# Altium PCB FA TOOL 20131212_V2.0.PcbDoc (part 2 of 2)
Units mm, origin at the board's own origin, x right, y up, seen from the top; angles counter-clockwise.
Board outline 121.5 x 90 mm, 4 copper layers (Top Layer, Mid-Layer 1, Mid-Layer 2, Bottom Layer); 249 components, 157 nets, 678 pads, 153 vias.
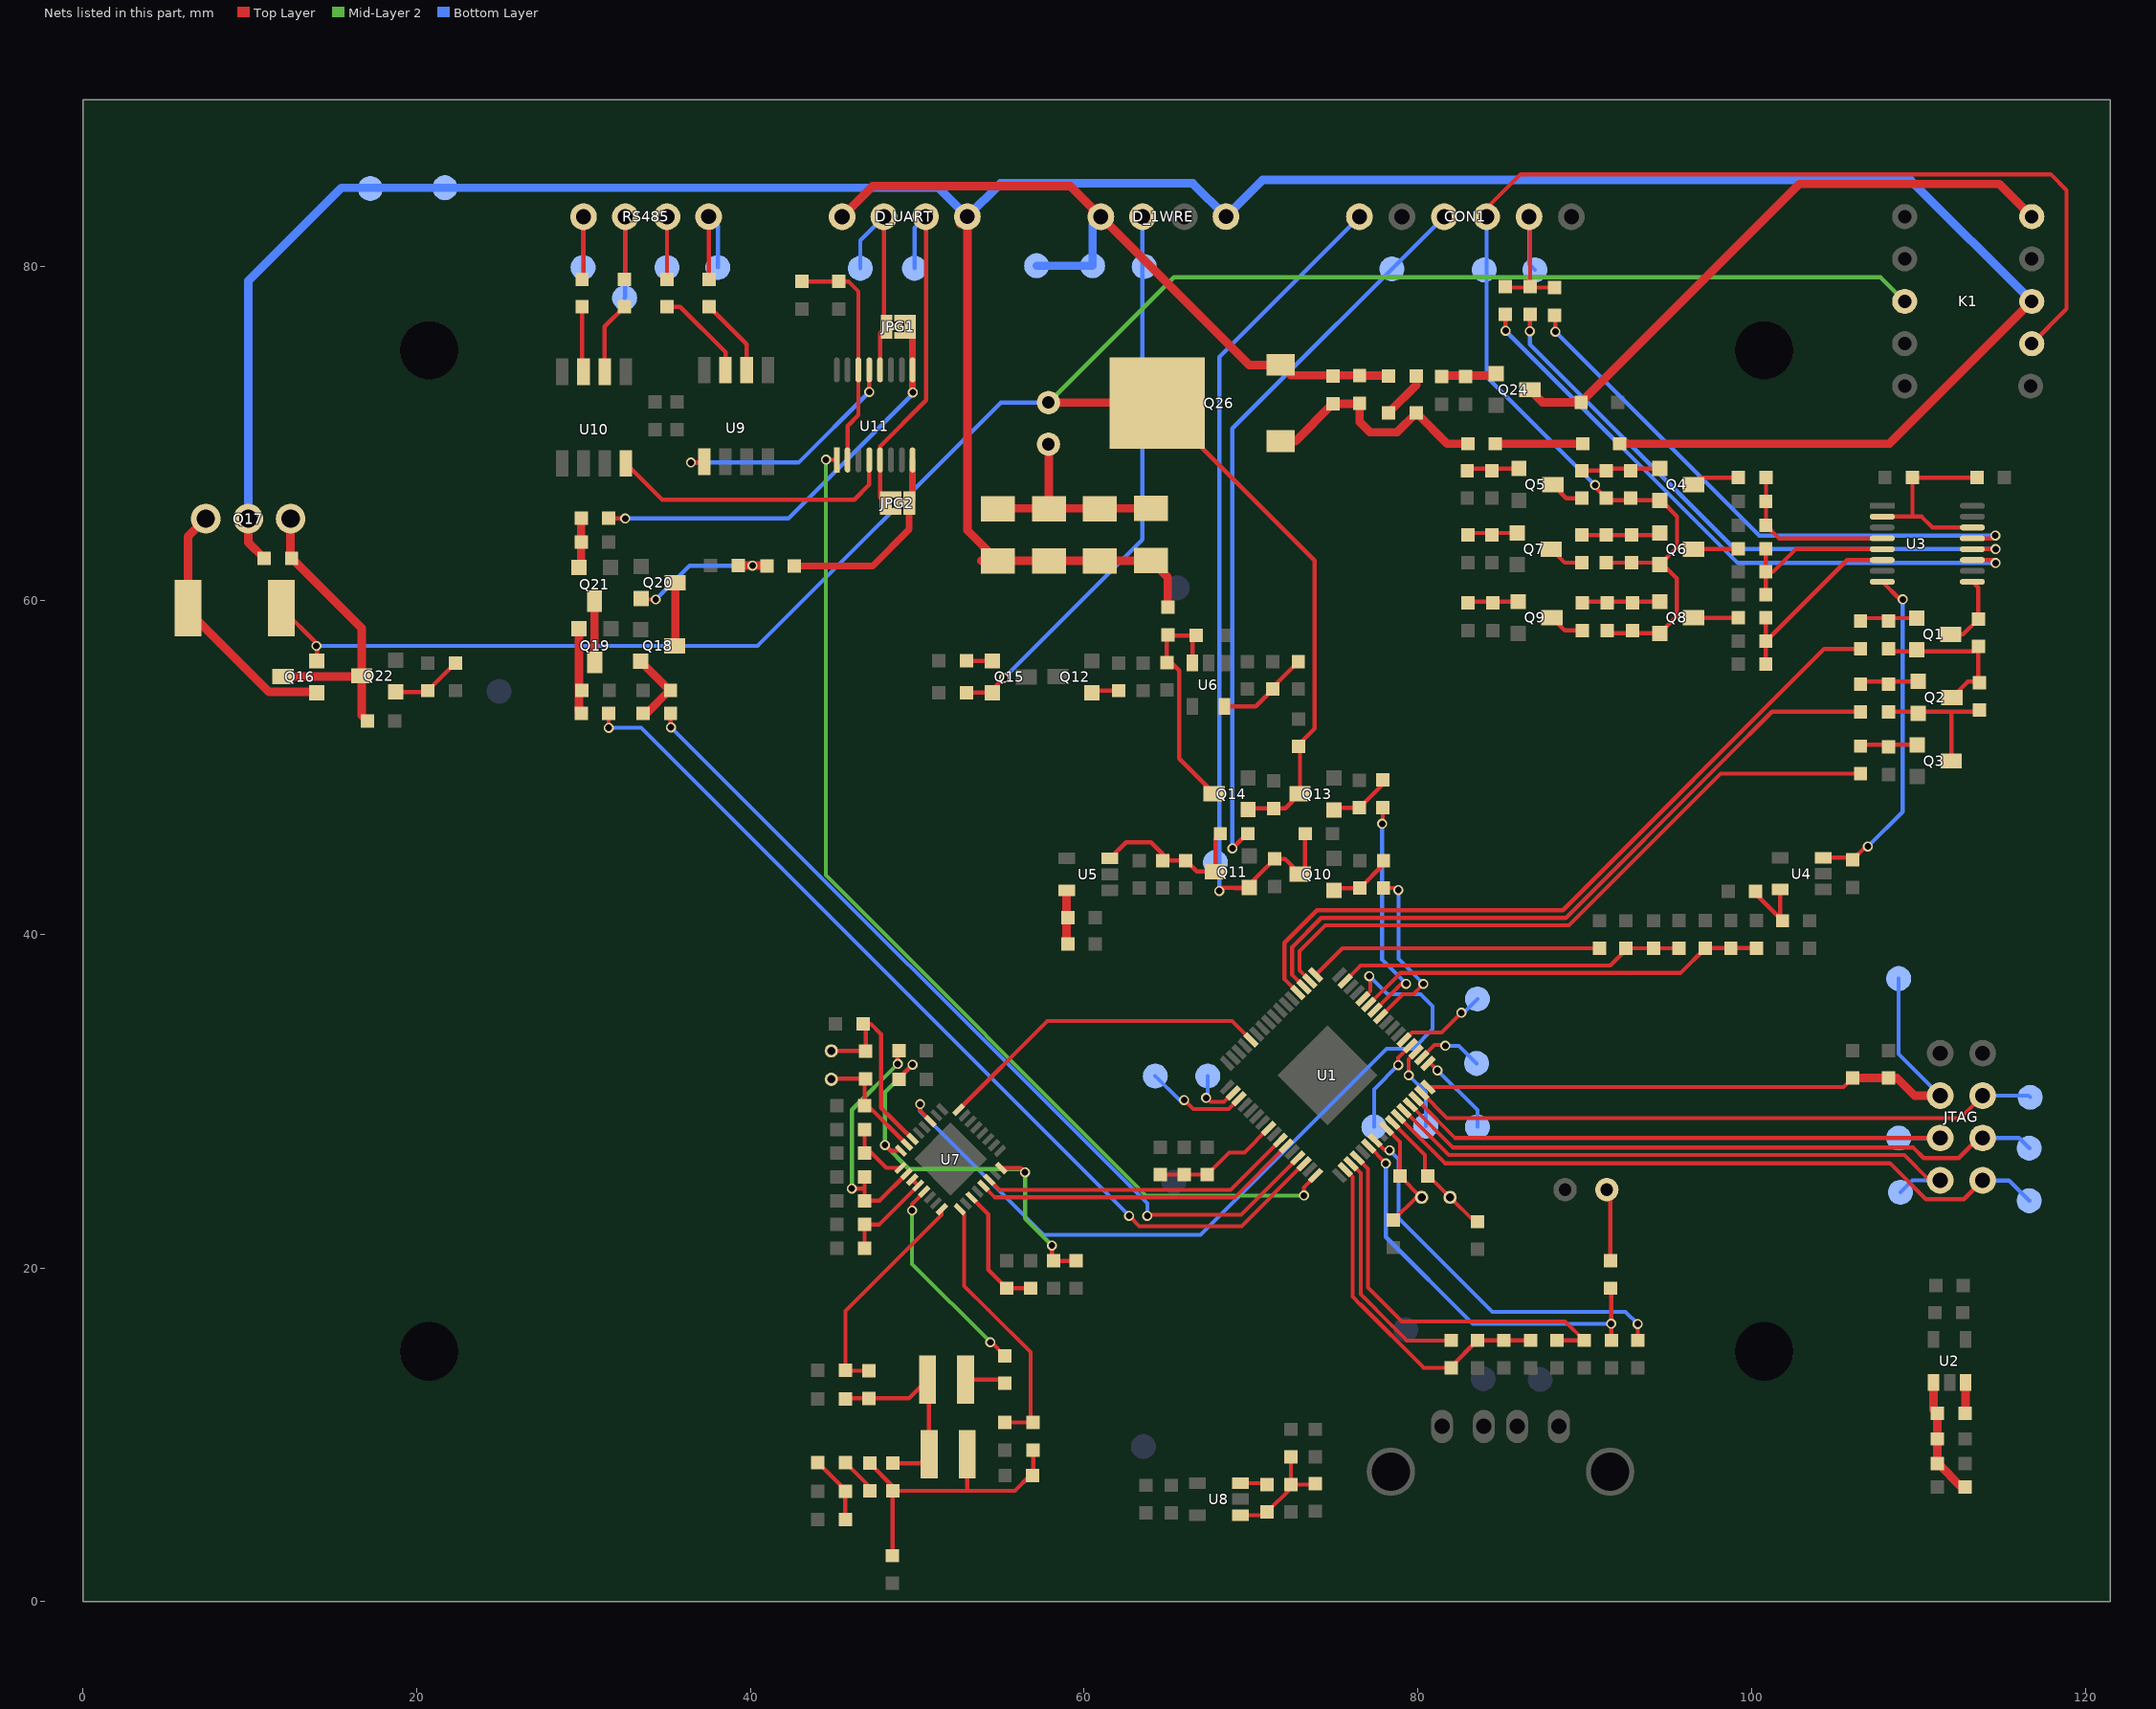
[diagram p4: the nets of this part, all layers, seen from the top]

## Via types
v1: diameter 0.6, hole 0.4, Top Layer to Bottom Layer, tented both sides, 153 vias

## Nets (pads, with @x,y where several pads share a name; then routed paths per layer and width w, separated by ;. In a path a pad name is that pad's centre, name@x,y a point inside that pad or via, vN(x,y) a via of type N, cw(c..) or ccw(c..) an arc to the next point about the centre after c; other vN are vias at no path point) (continued)
"I/O 7": U1.28 U7.24 | length 20
  Top Layer w0.23: 57.774,34.773 57.786,34.785 ; 57.798,34.785 68.874,34.785 U1.28@69.889,33.77
  Top Layer w0.254: U7.24@52.483,29.482 57.774,34.773
"ID PIN": CON1.5 R14.2 R15.2 R16.2 TP35.1 | length 10.5
  Top Layer w0.23: R16.2@85.242,78.803 85.293,78.752 R14.2@88.189,78.752 ; CON1.5@86.66,83 86.716,82.944 R15.2@86.716,78.803
  Bottom Layer w0.23: CON1.5@86.66,83 86.66,80.167 TP35.1@87.02,79.807
IRQ: U1.43 U7.13 | length 19.7
  Top Layer w0.23: U7.13@53.962,24.922 54.652,24.232 69.041,24.232 U1.43@72.112,27.304
"LEV 1": R23.1 U1.18 | length 40.1
  Top Layer w0.23: U1.18@73.527,37.204 72.9,37.83 72.9,38.979 74.459,40.538 89.059,40.538 98.141,49.619 R23.1@106.528,49.619
"LEV 2": R20.1 U1.19 | length 42.6
  Top Layer w0.23: 72.455,37.568 U1.19@73.173,36.85
  Top Layer w0.254: 72.455,37.568 72.455,39.219 74.219,40.983 88.875,40.983 98.425,50.533 101.219,53.328 R20.1@106.528,53.328 R20.1@106.515,53.315
"LEV 3": R17.1 U1.20 | length 45.2
  Top Layer w0.23: 71.998,37.318 U1.20@72.819,36.497
  Top Layer w0.254: 71.998,37.318 71.998,39.486 73.952,41.44 88.685,41.44 104.345,57.1 R17.1@106.578,57.1
MOD: U1.42 U7.14 | length 18.9
  Top Layer w0.23: U7.14@54.316,25.275 54.926,24.666 68.767,24.666 U1.42@71.759,27.658
NetC2_1: C2.1 R2.1 U1.52 | length 24.2
  Top Layer w0.23: U1.52@76.355,26.597 76.355,26.587 77.001,25.941 77.001,23.749 ; 77.001,23.451 77.001,23.749 ; C2.1@89.967,15.659 88.823,16.802 79.032,16.802 77.001,18.833 77.001,23.749
  Top Layer w0.254: R2.1@88.341,15.659 C2.1@89.967,15.659
NetC3_1: C3.1 R3.2 R4.1 R5.1 U1.50 | length 21
  Top Layer w0.23: U1.50@75.648,25.88 U1.50@75.648,25.89 76.09,25.448 ; 76.085,25.443 76.09,25.438 76.09,18.277 76.562,17.805
  Top Layer w0.254: 76.562,17.805 80.358,14.009 R5.1@81.991,14.009 81.991,14.084 R4.1@83.566,15.659 C3.1@85.141,15.659 R3.2@86.766,15.659
NetC7_2: C7.2 R7.2 U1.57 X1.1 | length 7.2
  Top Layer w0.23: U1.57@78.123,28.365 78.931,27.557 R7.2@78.931,25.502 X1.1@80.201,24.232 ; C7.2@78.537,22.872 79.896,24.232 X1.1@80.201,24.232 ; X1.1@80.227,24.232 X1.1@80.201,24.232
NetC8_1: C8.1 R7.1 U1.58 X1.2 | length 8.2
  Top Layer w0.23: U1.58@78.476,28.718 80.429,26.766 R7.1@80.429,25.451 ; R7.1@80.581,25.502 80.657,25.502 X1.2@81.927,24.232 83.388,22.771 C8.1@83.566,22.771
NetC9_2: C9.2 C10.2 R8.2 R9.2 U2.1 | length 7.2
  Top Layer w0.508: U2.1@110.907,13.132 110.907,11.509 R9.2@111.138,11.278 C9.2@111.138,8.28 111.162,8.28 112.585,6.858 R8.2@112.788,6.858
NetC13_1: C13.1 C16.1 R11.1 U1.11 | length 24.3
  Top Layer w0.23: U1.11@77.29,36.017 78.776,37.503
  Top Layer w0.254: 78.776,37.503 78.941,37.668 95.732,37.668 R11.1@97.231,39.167 C13.1@98.755,39.167 C16.1@100.279,39.167
NetC14_1: C14.1 C15.1 R10.2 U1.15 | length 20.8
  Top Layer w0.23: U1.15@75.648,37.204 76.57,38.125
  Top Layer w0.254: 76.57,38.125 91.528,38.125 92.558,39.155 C15.1@94.132,39.155 95.644,39.155 R10.2@95.656,39.167
NetC17_2: C17.2 U1.17 | length 17.8
  Top Layer w0.254: U1.17@73.884,37.561 75.478,39.155 C17.2@90.983,39.155
NetC18_1: C18.1 C19.1 R12.2 U1.40 | length 7.6
  Top Layer w0.23: R12.2@64.567,25.591 C18.1@65.989,25.591 C19.1@67.361,25.591 68.694,26.924 69.611,26.924 U1.40@71.052,28.365
NetC20_2: C20.2 R13.2 U3.2 U3.14 | length 11.8
  Top Layer w0.254: U3.2@107.828,65.023 110.186,65.023 110.836,64.373 U3.14@113.228,64.373 ; 109.639,65.125 C20.2@109.639,67.361 R13.2@113.5,67.361
NetC21_1: C21.1 R25.2 R26.2 U3.4 | length 10.1
  Top Layer w0.254: C21.1@100.85,64.516 101.643,63.723 U3.4@107.828,63.723 ; C21.1@100.863,64.529 R26.2@100.863,67.361
NetC22_1: C22.1 R31.2 R32.2 U3.5 | length 10.3
  Top Layer w0.254: R31.2@100.85,60.35 C22.1@100.85,61.722 ; R32.2@100.85,63.094 C22.1@100.85,61.722 ; U3.5@107.828,63.073 102.647,63.073 101.295,61.722 C22.1@100.85,61.722
NetC23_1: C23.1 R37.2 R38.2 U3.6 | length 11.8
  Top Layer w0.254: R37.2@100.85,56.185 C23.1@100.85,57.556 ; R38.2@100.85,58.979 C23.1@100.85,57.556 ; U3.6@107.828,62.423 105.717,62.423 C23.1@100.85,57.556
NetC24_2: C24.2 Q4.1 R27.1 R28.1 | length 4.7
  Top Layer w0.254: R28.1@89.814,67.779 R27.1@91.288,67.779 91.415,67.907 Q4.1@94.488,67.907
NetC25_2: C25.2 Q6.1 R33.1 R34.1 | length 4.7
  Top Layer w0.254: R34.1@89.814,63.919 R33.1@91.288,63.919 C25.2@92.812,63.919 94.361,63.919 Q6.1@94.488,64.046
NetC26_2: C26.2 Q8.1 R39.1 R40.1 | length 4.7
  Top Layer w0.254: R40.1@89.865,59.855 89.942,59.931 Q8.1@94.488,59.931
NetC27_1: C27.1 R43.1 U4.5 | length 4.4
  Top Layer w0.254: R43.1@100.241,42.57 100.241,42.418 C27.1@101.854,40.805 101.702,40.957 U4.5@101.702,42.67
NetC28_1: C28.1 U3.8 U4.3 | length 20.3
  Top Layer w0.254: U4.3@104.292,44.58 C28.1@106.045,44.58 ; C28.1@106.045,44.45 v1@106.854,45.259 ; U3.8@107.868,61.163 U3.8@107.828,61.123 108.881,60.071 v1(109.055,60.071)
  Bottom Layer w0.254: v1(106.969,45.259) 109.042,47.333 v1@109.042,60.071
NetC31_1: C31.1 R50.2 U5.5 | length 3
  Top Layer w0.508: R50.2@58.954,39.586 U5.5@58.954,42.631
NetC32_1: C32.1 Q11.3 R48.2 R49.2 U5.3 | length 10.4
  Top Layer w0.254: U5.3@61.544,44.541 62.509,45.507 64.005,45.507 64.719,44.793 C32.1@64.719,44.411 C32.1@65.024,44.411 ; C32.1@65.024,44.697 C32.1@65.024,44.411 ; R48.2@68.161,46.025 67.869,45.732 Q11.3@67.869,43.752 66.751,43.752 R49.2@66.091,44.411 C32.1@65.024,44.411
NetC34_1: C34.1 R59.2 U6.5 | length 5.6
  Top Layer w0.254: U6.5@68.405,53.658 70.282,53.658 C34.1@71.31,54.687 71.31,54.813 R59.2@72.834,56.337
NetC35_1: C35.1 Q14.3 R57.2 R58.2 U6.3 | length 14.3
  Top Layer w0.254: U6.3@66.495,56.248 66.495,57.668 C35.1@66.726,57.899 65.05,57.899 64.96,57.81 R58.2@64.96,56.286 65.215,56.286 65.697,55.804 65.697,50.521 Q14.3@67.793,48.425
NetC38_2: C38.2 R82.2 U7.31 X2.1 | length 7.1
  Top Layer w0.254: X2.1@44.874,31.331 R82.2@46.906,31.331 ; R82.2@46.842,31.267 C38.2@46.842,29.718 47.045,29.718 U7.31@49.38,27.382
NetC39_1: C39.1 R82.1 U7.30 X2.2 | length 12.2
  Top Layer w0.254: X2.2@44.849,33.006 46.881,33.006 R82.1@46.906,32.981 46.906,34.467 C39.1@46.753,34.62 47.211,34.62 47.821,34.011 47.821,29.601 48.55,28.872 49.321,28.101 49.34,28.101 49.706,27.736 U7.30@49.734,27.736
NetC40_1: C40.1 C41.1 U7.3 U7.4 | length 6.1
  Top Layer w0.254: C40.1@46.842,21.184 C41.1@46.842,22.606 47.728,22.606 U7.4@50.057,24.935 U7.3@49.703,25.289
NetC42_1: C42.1 C43.1 R80.2 U7.2 | length 14.8
  Top Layer w0.254: v1(46.081,24.752) 46.817,24.752 46.842,24.727 ; C43.1@46.842,25.451 46.842,24.727 ; R80.2@48.799,33.02 48.799,32.245 v1(48.824,32.22) ; U7.2@49.35,25.642 47.736,24.028 C42.1@46.842,24.028 46.842,24.727
  Mid-Layer 2 w0.254: v1(46.081,24.752) 46.081,29.477 v1(48.824,32.22)
NetC44_1: C44.1 C45.1 U7.1 | length 3.7
  Top Layer w0.254: C44.1@46.842,28.296 46.842,27.305 48.152,25.996 U7.1@48.996,25.996
NetC48_1: C48.1 C49.1 U7.11 | length 7.7
  Top Layer w0.254: U7.11@53.255,24.214 54.26,23.21 54.26,19.889 C48.1@55.364,18.784 C49.1@56.736,18.784
NetC50_1: C50.1 L1.2 | length 2.4
  Top Layer w0.254: L1.2@52.893,13.297 55.028,13.297 C50.1@55.244,13.081
NetC50_2: C50.2 U7.5 | length 12.5
  Top Layer w0.23: v1(49.688,23.444) 49.688,23.813 50.41,24.536 U7.5@50.41,24.581 ; v1(54.381,15.545) 54.43,15.545 C50.2@55.244,14.732
  Mid-Layer 2 w0.23: v1(49.688,23.444) 49.688,20.239 v1(54.381,15.545)
NetC51_1: C51.1 C53.1 C54.2 L1.1 L2.2 | length 12.8
  Top Layer w0.254: C53.1@45.693,12.141 45.731,12.179 C51.1@47.255,12.179 ; C51.1@47.103,12.18 49.491,12.18 L1.1@50.608,13.297 ; C54.2@48.525,8.293 50.164,8.293 L2.2@50.711,8.839 50.711,13.194 L1.1@50.608,13.297 ; L1.1@50.393,13.081 L1.1@50.608,13.297
NetC51_2: C51.2 C52.1 U7.8 | length 13.6
  Top Layer w0.23: C51.2@47.255,13.829 45.731,13.829 C52.1@45.693,13.868 45.693,17.421 51.471,23.199 U7.8@51.471,23.521
NetC54_1: C54.1 C55.1 C56.1 L2.1 R84.2 R85.1 | length 18.8
  Top Layer w0.254: R84.2@47.154,8.293 48.525,6.921 C54.1@48.525,6.643 ; R85.1@48.514,2.755 48.525,2.767 C54.1@48.525,6.643 ; L2.1@52.996,8.7 L2.1@52.996,8.839 52.996,6.693 53.046,6.643 ; C55.1@56.908,7.569 C55.1@56.947,7.608 ; C56.1@56.947,9.081 C55.1@56.947,7.608 ; C54.1@48.525,6.643 53.046,6.643 ; 53.046,6.643 55.853,6.643 56.78,7.569 56.818,7.608 56.908,7.608 C55.1@56.947,7.608
NetC56_2: C56.2 C57.1 U7.9 | length 16.4
  Top Layer w0.23: U7.9@52.548,23.507 52.812,23.244 52.812,18.92 54.255,17.476 56.78,14.952 C56.2@56.78,10.922 ; C57.1@55.243,10.731 C56.2@56.947,10.731
  Top Layer w0.254: C56.2@56.78,10.922 C56.2@57.123,10.922
NetC58_1: C58.1 C59.1 R83.2 | length 4.3
  Top Layer w0.254: C58.1@44.043,8.331 45.693,6.681 C59.1@45.693,6.604 R83.2@45.693,4.928 R83.2@45.693,4.763
NetC58_2: C58.2 R84.1 | length 2.3
  Top Layer w0.254: C58.2@45.693,8.331 47.154,6.87 R84.1@47.154,6.643
NetC60_2: C60.2 C61.2 R86.2 R87.2 U8.1 | length 7
  Top Layer w0.23: U8.1@69.367,5.192 70.787,5.192 R87.2@70.968,5.373 72.39,6.795 C60.2@72.39,7.023 ; R86.2@72.39,8.675 C60.2@72.39,7.023 ; C61.2@73.812,7.023 C60.2@72.39,7.023
NetC66_2: C66.2 R92.1 U11.2 U11.14 | length 14
  Top Layer w0.254: R92.1@43.078,79.121 C66.2@45.292,79.121 45.873,79.121 46.472,78.521 U11.14@46.472,73.82 46.472,71.11 45.822,70.46 U11.2@45.822,68.42
NetC67_2: C67.2 D3.1 Q26.1 R93.2 R94.1 | length 14.8
  Top Layer w0.508: Q26.1@71.772,69.546 72.657,69.546 C67.2@74.905,71.794 R94.1@76.505,71.794 ; R94.1@76.505,71.819 R94.1@76.505,71.794 ; R93.2@82.995,69.393 81.755,69.393 D3.1@79.908,71.239 78.748,70.079 77.127,70.079 76.505,70.701 R94.1@76.505,71.794
NetD1_2: D1.2 R1.2 | length 4.3
  Top Layer w0.254: D1.2@91.318,24.689 91.542,24.466 R1.2@91.542,20.434
NetD2_1: D2.1 K1.8 Q13.3 Q14.1 Q16.2 Q26.3 R55.2 R56.1 R62.2 | length 146.8
  Top Layer w0.254: R62.2@11.893,59.538 14.021,57.41 Q16.2@14.021,56.375 ; Q26.3@64.341,71.862 Q26.3@64.372,71.831 73.812,62.391 73.812,52.321 72.847,51.356 R55.2@72.847,51.245 72.936,51.156 Q13.3@72.936,48.412 72.06,47.537 R56.1@71.349,47.537 69.901,47.537 Q14.1@69.825,47.46
  Top Layer w0.508: D2.1@57.861,71.862 Q26.3@64.341,71.862
  Mid-Layer 2 w0.254: D2.1@57.861,71.862 65.374,79.375 107.721,79.375 K1.8@109.169,77.927
  Bottom Layer w0.254: v1(13.995,57.277) 40.424,57.277 55.009,71.862 D2.1@57.861,71.862
NetD2_2: D2.2 R95.2 R96.2 R97.2 R98.2 | length 13
  Top Layer w0.508: R97.2@54.839,65.507 54.851,65.519 R98.2@57.887,65.519 ; D2.2@57.861,69.362 57.887,69.337 R98.2@57.887,65.519 ; R98.2@57.887,65.507 R98.2@57.887,65.519 ; R95.2@64.008,65.519 R98.2@57.887,65.519
NetD3_2: D3.2 D4.2 | length 2.9
  Top Layer w0.508: D4.2@78.232,71.239 79.908,72.916 D3.2@79.908,73.439
NetD5_2: D5.2 K1.1 Q24.3 | length 36.6
  Top Layer w0.508: Q24.3@86.716,72.631 87.465,71.882 D5.2@89.781,71.882 102.862,84.963 114.833,84.963 K1.1@116.789,83.007
NetD6_1: D6.1 R93.1 | length 5.2
  Top Layer w0.508: R93.1@84.645,69.393 D6.1@89.883,69.393
NetD_1WRE_3: D_1WRE.3 Q15.2 R60.2 TP25.1 | length 33.9
  Top Layer w0.254: R60.2@52.946,54.458 52.959,54.47 Q15.2@54.318,54.47 ; Q15.2@54.508,54.47 Q15.2@54.318,54.47 ; v1(55.207,55.359) Q15.2@54.318,54.47
  Bottom Layer w0.254: v1(55.207,55.359) 63.5,63.652 D_1WRE.3@63.5,83
NetQ1_1: Q1.1 R17.2 R18.2 | length 3.4
  Top Layer w0.254: R17.2@106.578,58.75 106.769,58.941 Q1.1@109.893,58.941
NetQ1_2: Q1.2 Q2.3 R18.1 R19.2 R22.1 | length 9.6
  Top Layer w0.254: R18.1@108.217,57.112 108.37,56.959 113.309,56.959 R19.2@113.589,57.239 113.589,55.13 112.953,55.13 Q2.3@112.001,54.178
NetQ1_3: Q1.3 R19.1 U3.9 | length 4.4
  Top Layer w0.254: Q1.3@111.925,57.975 112.675,57.975 R19.1@113.589,58.889 113.589,60.763 U3.9@113.228,61.123
NetQ2_1: Q2.1 R20.2 R21.2 | length 3.5
  Top Layer w0.254: R20.2@106.528,54.978 106.693,55.143 Q2.1@109.969,55.143
NetQ2_2: Q2.2 Q3.3 R21.1 R22.2 | length 8.4
  Top Layer w0.254: R21.1@108.204,53.328 111.976,53.328 ; Q3.3@111.963,50.381 111.963,53.315 111.976,53.328 ; R22.2@113.64,53.429 113.538,53.328 111.976,53.328
NetQ3_1: Q3.1 R23.2 R24.2 | length 3.4
  Top Layer w0.254: R23.2@106.528,51.269 106.604,51.346 Q3.1@109.931,51.346
NetQ4_3: Q4.3 R26.1 | length 2.9
  Top Layer w0.254: Q4.3@96.52,66.942 96.939,67.361 R26.1@99.213,67.361
NetQ5_1: Q5.1 R29.2 R30.2 | length 3.2
  Top Layer w0.254: R29.2@82.956,67.779 83.084,67.907 Q5.1@86.055,67.907
NetQ5_3: Q5.3 R28.2 | length 2.1
  Top Layer w0.254: Q5.3@88.087,66.942 88.9,66.129 R28.2@89.814,66.129
NetQ6_3: Q6.3 R32.1 | length 2.7
  Top Layer w0.254: Q6.3@96.52,63.081 R32.1@99.187,63.081
NetQ7_1: Q7.1 R35.2 R36.2 | length 3
  Top Layer w0.254: R35.2@83.007,63.919 83.135,64.046 Q7.1@85.954,64.046
NetQ7_3: Q7.3 R34.2 | length 2.2
  Top Layer w0.254: Q7.3@87.986,63.081 88.798,62.269 R34.2@89.814,62.269
NetQ8_3: Q8.3 R38.1 | length 2.7
  Top Layer w0.254: Q8.3@96.52,58.966 99.187,58.966 R38.1@99.2,58.979
NetQ9_1: Q9.1 R41.2 R42.2 | length 3
  Top Layer w0.254: R41.2@83.007,59.855 83.084,59.931 Q9.1@86.004,59.931
NetQ9_3: Q9.3 R40.2 | length 2.1
  Top Layer w0.254: Q9.3@88.036,58.966 88.798,58.205 R40.2@89.865,58.205
NetQ10_1: Q10.1 R44.2 R45.1 | length 3.8
  Top Layer w0.254: Q10.1@74.981,42.634 75.108,42.761 R45.1@76.517,42.761 77.94,44.184 R44.2@77.94,44.411
NetQ12_1: Q12.1 R52.2 | length 1.7
  Top Layer w0.254: Q12.1@60.452,54.47 60.579,54.598 R52.2@62.078,54.598
NetQ13_1: Q13.1 R53.2 R54.1 | length 3.8
  Top Layer w0.254: Q13.1@74.968,47.447 75.096,47.575 R54.1@76.492,47.575 77.902,48.984 R53.2@77.902,49.237
NetQ15_1: Q15.1 R61.2 | length 1.6
  Top Layer w0.254: R61.2@52.946,56.388 52.959,56.375 Q15.1@54.508,56.375
NetQ16_1: Q16.1 Q17.2 R62.1 | length 15.7
  Top Layer w0.508: Q17.2@7.366,64.9 6.293,63.828 R62.1@6.293,59.538 6.293,59.392 11.164,54.521 13.97,54.521 Q16.1@14.021,54.47
NetQ16_3: Q16.3 Q17.1 Q22.3 R63.2 R64.1 | length 19.2
  Top Layer w0.508: Q16.3@11.989,55.435 Q22.3@16.65,55.435 ; Q17.1@12.446,64.9 12.446,62.598 R63.2@12.509,62.535 16.7,58.343 Q22.3@16.7,55.486 Q22.3@16.7,55.435 ; 16.7,54.94 Q22.3@16.7,55.435 ; R64.1@17.044,52.781 16.7,53.125 Q22.3@16.7,55.435
NetQ18_2: Q18.2 R65.1 R68.2 | length 4.6
  Top Layer w0.5: Q18.2@33.426,56.35 35.166,54.61 35.147,54.61 33.776,53.238 R65.1@33.567,53.238
NetQ18_3: Q18.3 Q20.3 | length 3.8
  Top Layer w0.5: Q18.3@35.458,57.29 35.496,57.328 Q20.3@35.496,61.062
NetQ19_2: Q19.2 R66.1 R67.2 | length 5.1
  Top Layer w0.508: Q19.2@29.731,58.318 29.731,53.366 R66.1@29.858,53.238
NetQ19_3: Q19.3 Q21.3 | length 3.7
  Top Layer w0.508: Q21.3@30.658,59.957 30.658,56.299 Q19.3@30.67,56.286
NetQ20_2: Q20.2 R69.2 R70.1 | length 9.3
  Top Layer w0.254: Q20.2@33.465,60.122 33.528,60.058 v1(34.328,60.058)
  Top Layer w0.5: R69.2@39.268,62.09 v1(40.132,62.09) 40.971,62.09 R70.1@40.983,62.078
  Bottom Layer w0.254: v1(34.328,60.058) 36.36,62.09 v1(40.132,62.09)
NetQ21_2: Q21.2 R71.2 R72.1 | length 3
  Top Layer w0.508: Q21.2@29.718,61.989 29.858,62.129 R71.2@29.858,63.5 R72.1@29.858,64.922
NetQ22_1: Q22.1 R103.1 R104.2 | length 4.3
  Top Layer w0.254: Q22.1@18.732,54.521 20.586,54.521 R104.2@20.663,54.598 22.313,56.248 R103.1@22.339,56.248
NetQ24_1: Q24.1 R73.2 R74.2 | length 3.2
  Top Layer w0.508: R73.2@81.483,73.482 84.569,73.482 Q24.1@84.684,73.596
NetR9_1: R9.1 U2.3 | length 1.8
  Top Layer w0.508: R9.1@112.817,11.306 U2.3@112.817,13.132
NetR14_1: R14.1 U3.13 | length 33.8
  Top Layer w0.254: v1(88.24,76.111) R14.1@88.24,77.051 ; U3.13@113.228,63.723 114.434,63.723 v1(114.605,63.894)
  Bottom Layer w0.254: v1(88.24,76.111) 100.457,63.894 v1(114.605,63.894)
NetR15_1: R15.1 U3.12 | length 36.2
  Top Layer w0.254: v1(86.703,76.136) R15.1@86.703,77.14 ; U3.12@113.228,63.073 113.236,63.081 v1(114.617,63.081)
  Bottom Layer w0.254: v1(86.703,76.136) 86.703,75.361 98.983,63.081 101.155,63.081 v1(114.617,63.081)
NetR16_1: R16.1 U3.11 | length 37.6
  Top Layer w0.254: v1(85.255,76.162) R16.1@85.255,77.14 ; U3.11@113.228,62.423 114.437,62.423 v1(114.617,62.243)
  Bottom Layer w0.254: v1(85.255,76.162) 99.174,62.243 v1(114.617,62.243)
NetR87_1: R87.1 U8.3 | length 1.5
  Top Layer w0.23: U8.3@69.367,7.102 R87.1@70.888,7.102
NetR88_1: R88.1 U9.6 | length 4.7
  Top Layer w0.254: R88.1@37.532,77.597 39.776,75.353 U9.6@39.776,73.806
NetR88_2: R88.2 RS485.1 TP21.1 | length 7
  Top Layer w0.254: R88.2@37.5,79.279 RS485.1@37.5,83.005
  Bottom Layer w0.254: RS485.1@37.5,83.005 38.049,82.456 TP21.1@38.049,79.959
NetR89_1: R89.1 U9.7 | length 5.7
  Top Layer w0.254: R89.1@34.992,77.597 35.788,77.597 38.506,74.879 U9.7@38.506,73.806
NetR89_2: R89.2 RS485.2 TP22.1 | length 6.8
  Top Layer w0.254: R89.2@35,79.256 RS485.2@35,83
  Bottom Layer w0.254: RS485.2@35,83 35,79.96 TP22.1@35.001,79.959
NetR90_1: R90.1 U10.6 | length 4.9
  Top Layer w0.254: U10.6@31.267,73.718 31.267,76.413 R90.1@32.452,77.597 R90.1@32.055,77.2
NetR90_2: R90.2 RS485.3 TP23.1 | length 8.6
  Top Layer w0.254: R90.2@32.5,79.296 RS485.3@32.5,83
  Bottom Layer w0.254: TP23.1@32.461,78.13 32.5,78.169 RS485.3@32.5,83
NetR91_1: R91.1 U10.7 | length 3.8
  Top Layer w0.254: U10.7@29.912,73.803 R91.1@29.912,77.597
NetR91_2: R91.2 RS485.4 TP20.1 | length 6.7
  Top Layer w0.254: R91.2@30,79.336 RS485.4@30,83
  Bottom Layer w0.254: TP20.1@29.972,79.959 30,79.987 RS485.4@30,83
NetTP15_1: TP15.1 U1.1 | length 5.1
  Top Layer w0.23: U1.1@80.598,32.254 80.763,32.254 v1(81.178,31.839)
  Bottom Layer w0.23: v1(81.178,31.839) 83.566,29.451 TP15.1@83.566,28.448
NetTP16_1: TP16.1 U1.2 | length 4
  Top Layer w0.23: U1.2@80.244,32.607 81.001,33.364 81.596,33.364 v1(81.648,33.312)
  Bottom Layer w0.23: v1(81.648,33.312) 82.461,33.312 TP16.1@83.515,32.258
NetTP17_1: TP17.1 U1.3 | length 5.1
  Top Layer w0.23: v1(79.449,31.544) 79.449,32.509 79.891,32.951 U1.3@79.891,32.961 U1.3@79.9,32.961
  Bottom Layer w0.23: v1(79.449,31.544) 80.467,30.526 TP17.1@80.467,28.499
NetTP18_1: TP18.1 U1.4 | length 5.8
  Top Layer w0.23: v1(78.816,32.156) 78.816,32.594 U1.4@79.537,33.315 U1.4@79.547,33.315 ; v1@78.943,32.156 v1@78.956,32.169
  Bottom Layer w0.23: TP18.1@77.368,28.448 77.368,30.709 v1(78.816,32.156)
NetTP19_1: TP19.1 U1.5 | length 5.4
  Top Layer w0.23: U1.5@79.183,33.668 79.193,33.668 79.635,34.11 81.418,34.11 v1(82.601,35.293)
  Bottom Layer w0.23: v1(82.601,35.293) 82.74,35.293 TP19.1@83.566,36.119
NetU1_12: U1.12 U7.27 | length 51.5
  Top Layer w0.23: v1@50.132,29.883 50.132,29.459 U7.27@50.795,28.797 U7.27@50.776,28.797 ; U1.12@76.709,36.143 76.709,36.153 77.15,36.595 77.15,37.429 v1(77.089,37.49)
  Bottom Layer w0.23: v1(50.17,29.82) 50.17,29.383 54.739,24.814 ; 52.413,27.14 54.739,24.814 ; v1(77.089,37.49) 78.177,36.402 80.162,36.402 80.886,35.678 80.886,34.303 79.731,33.147 78.13,33.147 66.967,21.984 57.569,21.984 54.739,24.814
NetU9_1: U9.1 U11.13 | length 14.6
  Top Layer w0.254: v1(36.436,68.263) 37.192,68.263 U9.1@37.236,68.307 ; v1(47.117,72.492) 47.122,72.497 U11.13@47.122,73.82
  Bottom Layer w0.254: v1(36.436,68.263) 42.888,68.263 v1(47.117,72.492)
NetU10_4: U10.4 U11.4 | length 17.3
  Top Layer w0.254: U10.4@32.537,68.218 34.715,66.04 46.228,66.04 47.122,66.934 U11.4@47.122,68.42
"PACK C+": CON1.3 R48.1 TP33.1 | length 44.4
  Top Layer w0.254: v1(68.885,45.136) 69.774,46.025 R48.1@69.811,46.025
  Bottom Layer w0.254: v1(68.885,45.136) 68.885,70.305 CON1.3@81.58,83
"PACK C-": CON1.1 Q10.3 Q11.1 R46.2 R47.1 TP31.1 | length 53.5
  Top Layer w0.254: v1(68.097,42.596) 68.288,42.786 Q11.1@69.901,42.786 ; 69.037,42.748 69.863,42.748 Q11.1@69.901,42.786 ; R47.1@73.241,46.025 73.241,43.892 Q10.3@72.949,43.599 72.035,44.513 R46.2@71.425,44.513 69.901,42.989 Q11.1@69.901,42.786
  Bottom Layer w0.254: v1(68.097,42.596) 68.097,74.597 CON1.1@76.5,83
"PACK D+": D6.2 D_1WRE.1 D_UART.1 K1.3 Q17.3 R57.1 R63.1 R95.1 R96.1 R97.1 R98.1 TP24.1 TP27.1 | length 196.1
  Top Layer w0.508: Q17.3@9.906,64.9 9.906,63.488 R63.1@10.859,62.535 ; D_UART.1@52.565,82.57 D_UART.1@53,83.005 53,64.216 R97.1@54.839,62.378 ; R97.1@53.827,62.378 R97.1@54.839,62.378 ; R57.1@65.011,59.588 65.011,61.387 R95.1@64.008,62.39 60.935,62.39 54.851,62.39 R97.1@54.839,62.378 ; D6.2@92.083,69.393 108.255,69.393 K1.3@116.789,77.927
  Bottom Layer w0.508: Q17.3@9.906,64.9 9.906,79.146 15.494,84.734 51.27,84.734 D_UART.1@53,83.005 54.996,85.001 66.504,85.001 D_1WRE.1@68.5,83.005 70.694,85.199 109.518,85.199 K1.3@116.789,77.927
"PACK D- IN": C67.1 D4.1 D_1WRE.4 D_UART.4 Q26.2 R94.2 TP26.1 TP30.1 | length 44.7
  Top Layer w0.508: D_UART.4@45.5,83 47.336,84.836 59.164,84.836 D_1WRE.4@61,83 69.884,74.116 Q26.2@71.772,74.116 72.394,73.494 R94.2@76.505,73.494 ; R94.2@76.505,73.469 78.202,73.469 D4.1@78.232,73.439
  Bottom Layer w0.508: TP30.1@57.15,80.061 TP26.1@60.503,80.061 60.503,82.503 D_1WRE.4@61,83
PUR: R5.2 U1.51 | length 14.6
  Top Layer w0.23: U1.51@76.001,26.243 76.568,25.677 76.568,18.428 78.484,16.512 79.337,15.659 R5.2@81.991,15.659
RST: C6.2 JTAG.6 R6.2 TP10.1 U1.64 | length 38.7
  Top Layer w0.23: U1.64@80.598,30.84 105.503,30.84 C6.2@106.045,31.382
  Top Layer w0.5: 106.528,31.382 R6.2@108.204,31.382 ; R6.2@108.407,31.382 108.712,31.382 109.767,30.328 JTAG.6@111.303,30.328
  Bottom Layer w0.23: TP10.1@108.814,37.338 108.814,32.817 JTAG.6@111.303,30.328
RX: R66.2 U1.46 | length 56.5
  Top Layer w0.23: v1(31.509,52.362) R66.2@31.508,53.238 ; v1(62.687,23.127) 63.305,22.508 69.438,22.508 U1.46@73.173,26.243
  Bottom Layer w0.23: v1(31.509,52.362) 33.452,52.362 v1(62.687,23.127)
RX2: D_UART.3 JPG1.2 TP29.1 U11.12 | length 13.1
  Top Layer w0.254: U11.12@47.772,73.82 47.772,76.011 JPG1.2@48.165,76.403 48,76.568 D_UART.3@48,83
  Bottom Layer w0.254: TP29.1@46.584,79.908 46.584,81.584 D_UART.3@48,83
RXD: JPG1.1 R72.2 U11.9 | length 25.6
  Top Layer w0.254: R72.2@31.521,64.91 v1(32.499,64.91)
  Top Layer w0.4: R72.2@31.508,64.922 R72.2@31.521,64.91 ; JPG1.1@49.574,76.403 49.722,76.256 U11.9@49.722,73.82 49.722,72.477 v1(49.733,72.466)
  Bottom Layer w0.254: v1(32.499,64.91) 42.266,64.91 v1@49.898,72.542
SCL: TP13.1 U1.35 | length 6.1
  Top Layer w0.23: v1(65.989,30.061) 66.537,29.513 68.665,29.513 U1.35@69.284,30.133
  Bottom Layer w0.23: TP13.1@64.262,31.496 65.697,30.061 v1(65.989,30.061)
SDA: TP14.1 U1.34 | length 3.3
  Top Layer w0.23: v1@67.323,30.201 67.577,29.947 68.391,29.947 U1.34@68.93,30.486
  Bottom Layer w0.23: v1(67.31,30.188) 67.412,30.29 TP14.1@67.412,31.496
TCK: JTAG.5 TP9.1 U1.63 | length 37.7
  Top Layer w0.23: U1.63@80.244,30.486 81.749,28.981 112.497,28.981 JTAG.5@113.843,30.328
  Bottom Layer w0.23: JTAG.5@113.843,30.328 116.586,30.328 TP9.1@116.688,30.226
TDI: JTAG.3 TP7.1 U1.61 | length 39
  Top Layer w0.23: U1.61@79.664,29.652 82.113,27.203
  Top Layer w0.254: 82.113,27.203 109.69,27.203 110.312,26.581 112.408,26.581 113.614,27.788 JTAG.3@113.843,27.788
  Bottom Layer w0.254: JTAG.3@113.843,27.788 116.027,27.788 TP7.1@116.637,27.178
TDO: JTAG.2 TP6.1 U1.60 | length 36.5
  Top Layer w0.23: U1.60@79.183,29.425 81.851,26.758 109.145,26.758 110.655,25.248 JTAG.2@111.303,25.248
  Bottom Layer w0.23: TP6.1@108.915,24.536 109.626,25.248 JTAG.2@111.303,25.248
TEST: JTAG.1 TP5.1 U1.59 | length 40.8
  Top Layer w0.23: U1.59@78.83,29.072 81.626,26.276
  Top Layer w0.254: 81.626,26.276 108.286,26.276 110.444,24.117 112.713,24.117 JTAG.1@113.843,25.248
  Bottom Layer w0.254: JTAG.1@113.843,25.248 115.418,25.248 TP5.1@116.637,24.028
TMS: JTAG.4 TP8.1 U1.62 | length 34.7
  Top Layer w0.23: U1.62@80.043,29.98 82.236,27.788
  Top Layer w0.254: 82.236,27.788 JTAG.4@111.303,27.788
  Bottom Layer w0.254: TP8.1@108.814,27.788 JTAG.4@111.303,27.788
TX: R65.2 U1.45 | length 52.4
  Top Layer w0.23: R65.2@35.217,53.238 35.217,52.426 v1(35.242,52.4) ; v1@63.779,23.19 69.413,23.19 U1.45@72.819,26.597
  Bottom Layer w0.23: v1(35.242,52.4) 63.779,23.863 v1(63.779,23.127)
TX2: D_UART.2 JPG2.1 TP28.1 U11.5 | length 21.8
  Top Layer w0.254: JPG2.1@48.114,65.837 47.772,66.178 U11.5@47.772,68.42 47.772,69.235 50.533,71.996 50.533,82.967 D_UART.2@50.5,83
  Bottom Layer w0.254: TP28.1@49.835,79.908 49.835,82.335 D_UART.2@50.5,83
TXD: JPG2.2 R70.2 U11.8 | length 12
  Top Layer w0.4: R70.2@42.633,62.078 47.333,62.078 49.524,64.268 JPG2.2@49.524,65.837 49.722,66.035 U11.8@49.722,68.42
"UART A0": U1.48 U11.1 | length 63.6
  Top Layer w0.23: v1(44.526,68.44) 45.152,68.44 U11.1@45.172,68.42 ; v1(73.177,24.346) 73.177,24.834 U1.48@73.88,25.536
  Mid-Layer 2 w0.23: v1(44.526,68.44) 44.526,68.123 44.526,43.536 63.716,24.346 v1(73.177,24.346)
V18: C4.2 U1.55 | length 23.4
  Top Layer w0.23: U1.55@77.416,27.658 78.022,27.051 v1(78.308,27.051) ; C4.2@93.167,15.659 v1(93.167,16.637)
  Bottom Layer w0.23: v1(78.308,27.051) 78.842,26.518 78.842,22.987 84.455,17.374 92.431,17.374 v1(93.167,16.637)
V33: C5.2 R1.1 U1.54 | length 24.6
  Top Layer w0.23: U1.54@77.062,27.304 78.08,26.287 v1(78.08,26.264)
  Top Layer w0.254: C5.2@91.592,15.659 R1.1@91.592,18.733
  Bottom Layer w0.254: v1(78.08,26.264) 78.08,21.857 83.287,16.65 v1(91.58,16.65)
"V CHARGER": C24.1 C25.1 C26.1 CON1.4 K1.4 Q4.2 Q6.2 Q8.2 R27.2 R33.2 R39.2 TP34.1 | length 86
  Top Layer w0.254: CON1.4@84.12,83 84.12,83.51 86.157,85.547 117.919,85.547 118.872,84.595 118.872,77.47 K1.4@116.789,75.387 ; v1(90.614,66.916) 90.614,66.802 R27.2@91.288,66.129 91.415,66.002 Q4.2@94.488,66.002 94.564,66.002 95.529,65.037 95.529,63.182 Q6.2@94.488,62.141 ; R33.2@91.288,62.269 C25.1@92.812,62.269 94.361,62.269 Q6.2@94.488,62.141 ; R39.2@91.338,58.205 91.517,58.026 Q8.2@94.488,58.026 95.504,59.042 95.504,61.341 94.704,62.141 Q6.2@94.488,62.141
  Bottom Layer w0.254: CON1.4@84.12,83 84.12,73.411 v1(90.614,66.916)
VDD_X: C46.1 C47.1 R81.2 U7.16 U7.32 | length 25.5
  Top Layer w0.254: v1(48.062,27.368) 48.402,27.029 U7.32@49.027,27.029 ; R81.2@48.799,31.293 R81.2@48.824,31.293 ; R81.2@48.862,31.331 v1(49.713,32.182) ; U7.16@55.023,25.982 56.205,25.982 v1(56.457,25.73) ; C47.1@58.07,20.472 v1(58.07,21.349) ; C47.1@58.133,20.421 C46.1@59.555,20.421
  Mid-Layer 2 w0.254: v1(49.713,32.182) 48.062,30.531 v1(48.062,27.368) 49.502,25.929 v1@56.258,25.929 ; v1(56.457,25.73) 56.457,22.962 v1(58.07,21.349)
VPC-_GATE: R44.1 U1.9 | length 10.5
  Top Layer w0.23: U1.9@77.769,35.082 79.102,36.415 79.722,36.415 v1(80.328,37.02) ; R44.1@77.94,42.761 78.714,42.761 v1(78.829,42.647)
  Bottom Layer w0.23: v1(78.829,42.647) 78.829,38.519 v1(80.328,37.02)
VPD-_GATE: R53.1 U1.10 | length 13.7
  Top Layer w0.23: U1.10@77.416,35.436 78.759,36.779 ; v1(77.864,46.622) 77.902,46.66 R53.1@77.902,47.587
  Top Layer w0.254: 78.759,36.779 79.013,37.033 v1(79.299,37.033)
  Bottom Layer w0.254: v1(77.864,46.622) 77.864,38.468 v1(79.299,37.033)
pads on no net: D_1WRE.2 K1.2 K1.5 K1.6 K1.9 U1.13 U3.7 U3.10 U3.48 U9.33 U10.33 U11.6 U11.7 U11.10 U11.11 U11.48 USB_A.0

## Polygon pours and split planes (outlines as drawn)
GND on Mid-Layer 1 "Bottom Layer-No Net" (hatched 90Degree grid 0.127 track 0.203, remove dead copper, pour order 1000): 85.636,88.062 86.601,87.097 86.601,79.578 96.368,69.812 118.542,69.812 119.634,68.72 119.634,4.318 117.373,2.057 85.763,2.007 46.164,41.681 1.473,41.719 0.66,42.469 0.66,85.928 2.794,88.062
GND on Mid-Layer 1 "Bottom Layer-No Net" (hatched 90Degree grid 0.127 track 0.203, remove dead copper, pour order 1001): 45.707,36.703 75.552,6.858 75.54,1.93 42.786,1.943 41.465,3.264 41.516,35.992 42.227,36.703
GND on Bottom Layer "Bottom Layer-No Net" (hatched 90Degree grid 0.127 track 0.203, remove dead copper, pour order 1002): 41.465,36.017 42.1,36.652 42.659,36.652 45.72,36.652 46.584,35.789 75.501,6.871 75.501,3.607 75.501,2.159 75.26,1.918 74.244,1.918 42.812,1.918 41.504,3.226 41.504,8.344 41.504,36.055 42.075,36.627 42.253,36.627
GND on Bottom Layer "Bottom Layer-No Net" (hatched 90Degree grid 0.127 track 0.203, remove dead copper, pour order 1003): 42.153,26.873 0.787,26.873 0.457,27.165 0.432,35.535 1.549,36.652 44.282,36.652 44.552,36.382 44.552,32.741

## Keep-outs
Keep-Out Layer:
  lines w0.127: 0,0 0,41 ; 0,0 0,41 ; 0,0 121.5,0 ; 0,41 3.75,41 ; 0,41 3.75,41 ; 0,49 3.75,49 ; 0,49 0,90 ; 0,49 0,90 ; 0,49 3.75,49 ; 0,90 121.5,90 ; 3.75,41 ccw(c3.75,45) 3.75,49 ; 3.75,41 ccw(c3.75,45) 3.75,49 ; 117.5,41 cw(c117.5,45) 117.5,49 ; 117.5,41 cw(c117.5,45) 117.5,49 ; 117.5,41 121.5,41 ; 117.5,41 121.5,41 ; 117.5,49 121.5,49 ; 117.5,49 121.5,49 ; 121.5,0 121.5,41 ; 121.5,0 121.5,41 ; 121.5,49 121.5,90 ; 121.5,49 121.5,90

## Other copper
Top Layer:
  text "TopLayer" at 71.404,-39.386 h2.29
Mid-Layer 1:
  text "MidLayer1" at 75.468,-39.158 h2.29
Mid-Layer 2:
  text "MidLayer2" at 75.819,-39.014 h2.29
Bottom Layer:
  text "BottomLayer" at 70.946,-39.183 h2.29

## Silkscreen, mask and mechanical layers (free items; w line width, h text height)
Top Overlay:
  text "TX-" at 29.159,80.112 h0.6
  text "TX+" at 31.699,80.099 h0.6
  text "RX-" at 34.277,80.099 h0.6
  text "GND" at 44.628,80.099 h0.6
  text "TX" at 50.051,80.086 h0.6
  text "VDD" at 52.311,80.099 h0.6
  text "GND" at 60.096,80.086 h0.6
  text "1WRE" at 62.598,80.099 h0.6
  text "RX+" at 36.881,80.073 h0.6
  text "RX" at 47.473,80.073 h0.6
  text "VDD" at 67.742,80.01 h0.6
  text "PACK-" at 74.308,79.883 h0.6
  text "PACK+" at 80.226,79.858 h0.6
  text "1WRE" at 77.584,79.845 h0.6
  text "VC" at 83.68,79.832 h0.6
  text "ID" at 86.119,79.845 h0.6
  text "GND" at 88.417,79.832 h0.6
  text "FA TOOL_V2.0" at 4.42,30.467 h1.5
  text "VDD" at 80.62,12.649 h0.6
  text "D+" at 85.56,12.649 h0.6
  text "D-" at 83.439,12.636 h0.6
  text "GND" at 87.605,12.611 h0.6
  text "TopOverlay" at 70.896,-39.386 h2.29
  text "GTO" at 114.253,-39.732 h2.29
Bottom Overlay:
  text "1WRE" at 63.094,85.407 h0.6 r270
  text "GND" at 60.719,85.369 h0.6 r270
  text "VDD" at 68.161,85.268 h0.6 r270
  text "VDD" at 52.692,85.217 h0.6 r270
  text "TX-" at 29.693,85.166 h0.6 r270
  text "RX+" at 37.109,85.166 h0.6 r270
  text "TX+" at 32.22,85.141 h0.6 r270
  text "RX-" at 34.633,85.141 h0.6 r270
  text "RX" at 47.727,85.115 h0.6 r270
  text "TX" at 50.254,85.115 h0.6 r270
  text "PACK-" at 76.162,85.128 h0.6 r270
  text "1WRE" at 78.791,85.09 h0.6 r270
  text "GND" at 45.263,85.065 h0.6 r270
  text "PACK+" at 81.166,85.014 h0.6 r270
  text "VC" at 83.744,84.963 h0.6 r270
  text "ID" at 86.144,84.912 h0.6 r270
  text "GND" at 88.798,84.925 h0.6 r270
  text "GND" at 88.113,7.061 h0.6 r270
  text "VDD" at 81.204,6.947 h0.6 r270
  text "D-" at 83.629,6.947 h0.6 r270
  text "D+" at 85.763,6.909 h0.6 r270
  text "BottomOverlay" at 70.946,-39.183 h2.29
  text "GBO" at 114.304,-39.528 h2.29
Top Paste:
  text "TopPaste" at 70.896,-39.386 h2.29
  text "GTP" at 114.253,-39.732 h2.29
Bottom Paste:
  text "BottomPaste" at 70.946,-39.183 h2.29
  text "GBP" at 114.304,-39.528 h2.29
Top Solder:
  text "TopSolder" at 70.896,-39.386 h2.29
  text "GTS" at 114.253,-39.732 h2.29
Bottom Solder:
  text "BottomSolder" at 70.946,-39.183 h2.29
  text "GBS" at 114.304,-39.528 h2.29
Drill Guide:
  text "DrillGuide" at 70.946,-39.183 h2.29
  text "DRL" at 114.304,-39.528 h2.29
Mechanical 1:
  drawing of 556 lines, arcs and shapes, not listed
  text "TITLE:" at 36.208,-19.113 h1.14
  text "ENGINEER:" at 13.665,-19.431 h1.14
  text "VIVI" at 23.398,-19.564 h1.52
  text "DYNAPACK" at 91.952,-20.732 h3.81
  text "PRIOR TO DATE:" at 13.619,-22.028 h1.14
  text "NTD" at 54.966,-23.749 h3.81
  text "ENGINEER:" at 13.665,-29.083 h1.14
  text "PART NO:" at 36.525,-31.179 h1.14
  text "REV:" at 80.658,-31.178 h1.14
  text "DATE:" at 92.405,-31.178 h1.14
  text "PRIOR TO DATE:" at 13.619,-31.629 h1.14
  text "41K4DM200KXXXX" at 48.209,-32.837 h2.29
  text "2.0" at 85.103,-33.083 h2.29
  text "12/12/2013" at 98.12,-33.083 h2.29
  text "FILE NAME:" at 13.665,-38.227 h1.14
  text "LAYER:" at 60.401,-38.227 h1.14
  text "GERBER:" at 106.629,-38.227 h1.14
  text "FA TOOL" at 29.21,-39.949 h2.29
Mechanical 2:
  drawing of 552 lines, arcs and shapes, not listed
Mechanical 11:
  lines w0.127: 84.95,-3.7 84.95,13.7
Drill Drawing:
  text ".Legend" at -0.138,93.024 h2
  text "DrillDrawing" at 70.946,-39.183 h2.29
  text "DRR" at 114.304,-39.528 h2.29

## Text inside footprints (layer, text, board x,y; h text height)
D1: Top Overlay "+" at 92.224,21.377 h1.5 r90
D2: Top Overlay "+" at 54.55,68.457 h1.5
D3: Top Overlay "-" at 79.68,69.977 h0.8
D4: Top Overlay "-" at 78.461,74.701 h0.8 r180
D5: Top Overlay "-" at 93.243,71.653 h0.8 r90
D6: Top Overlay "-" at 88.621,69.621 h0.8 r270